# Altium PCB WeatherBalloon_Main.PcbDoc
Units mil, origin at the board's own origin, x right, y up, seen from the top; angles counter-clockwise.
Board outline 4725 x 2755 mil, 2 copper layers (Top Layer, Bottom Layer); 14 components, 16 nets, 106 pads, 9 vias.
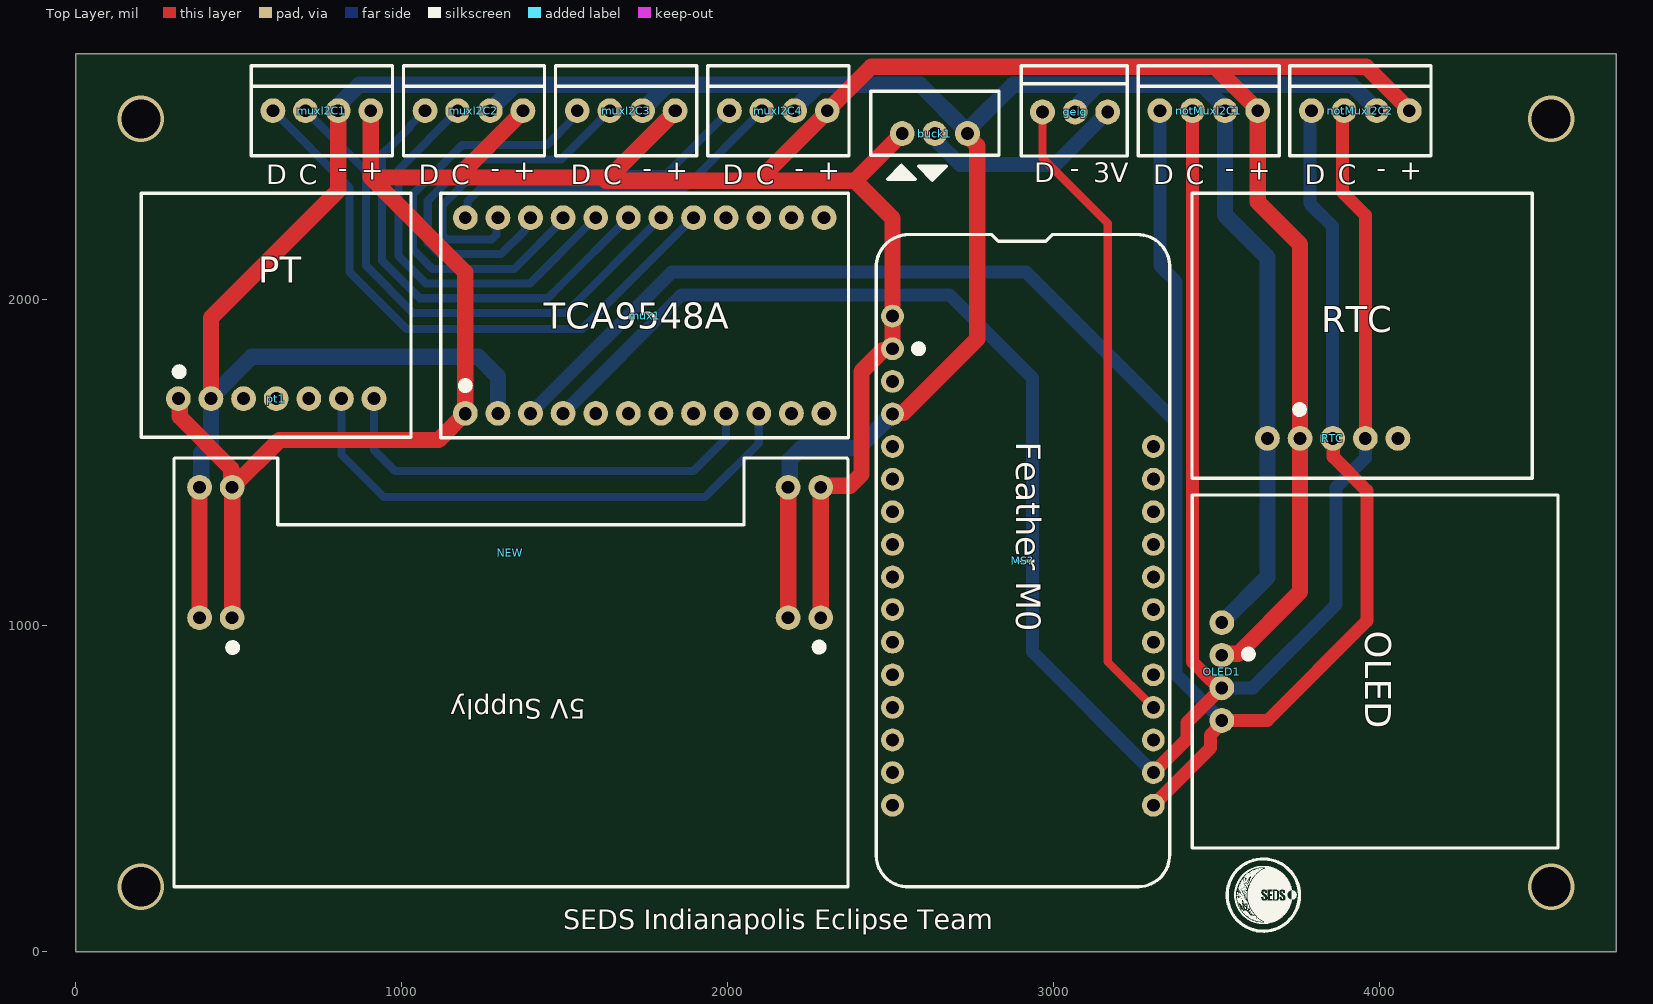
[diagram p0: Top Layer view]
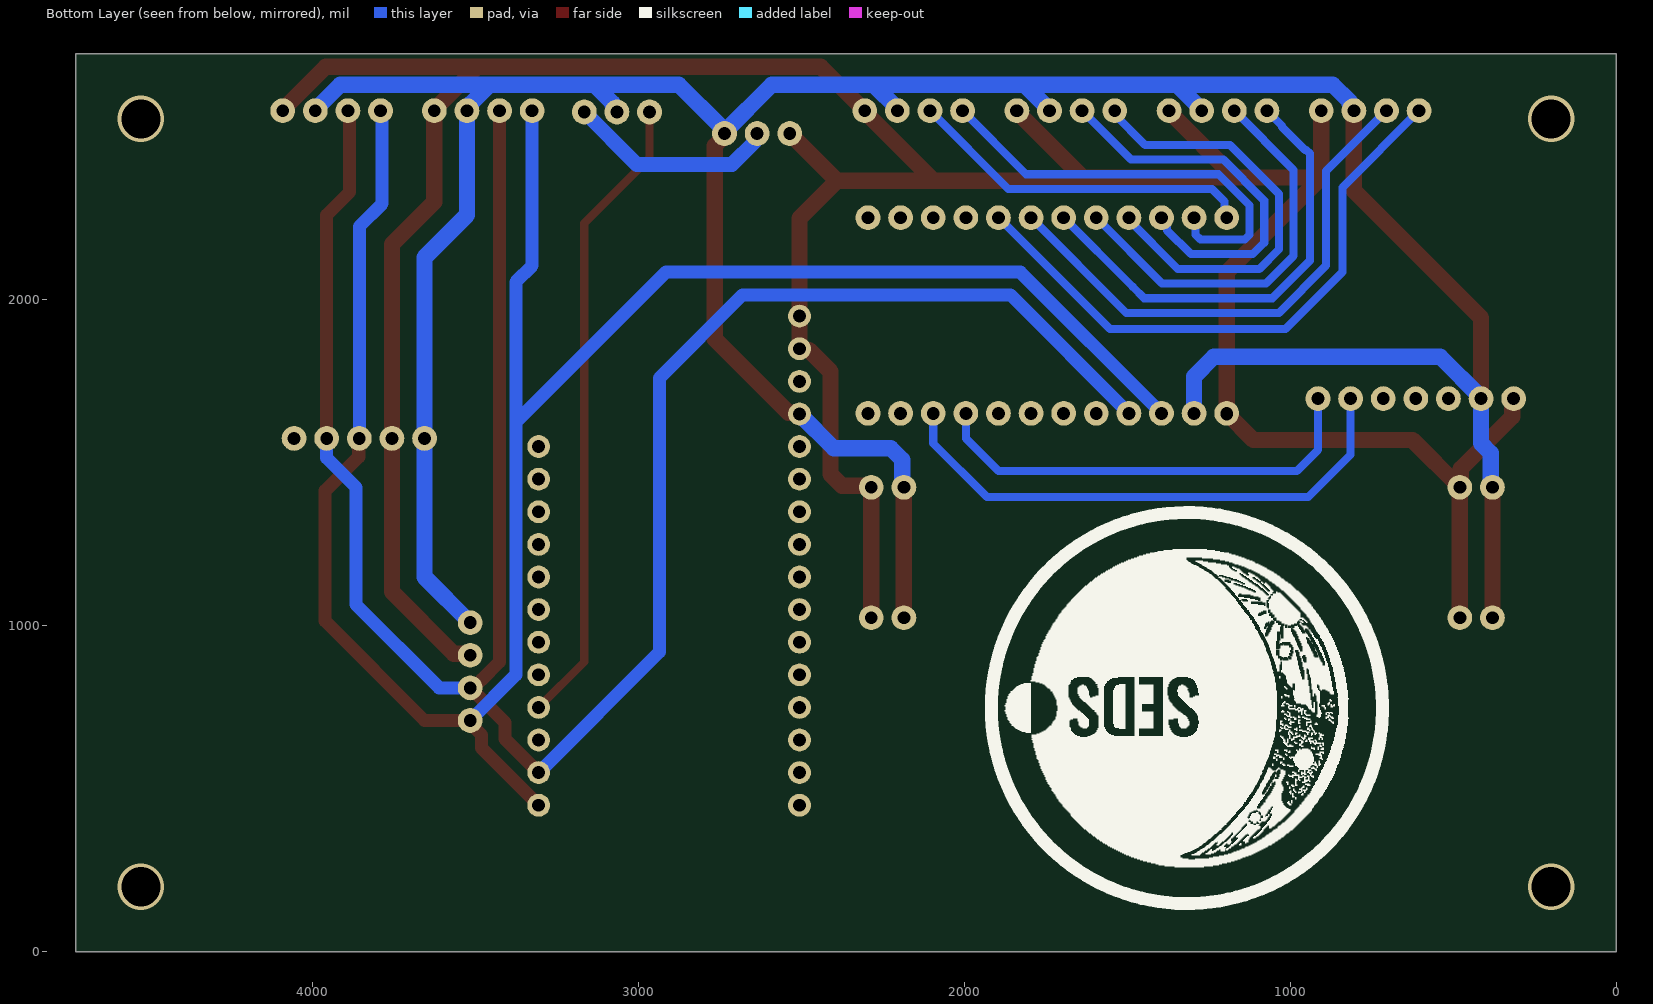
[diagram p1: Bottom Layer view, seen from below]

## Layer stack, top to bottom
Top Solder: solder mask 0.4, Solder Resist, Dk 3.5
Top Layer: signal copper 1.4
Dielectric 1: dielectric 12.6, FR-4, Dk 4.8
Bottom Layer: signal copper 1.4
Bottom Solder: solder mask 0.4, Solder Resist, Dk 3.5

## Board outline
0,0 4725,0 4725,2755 0,2755

## Design rules (kind name [scope] priority, off if disabled: settings)
Clearance Clearance_1 [OnMid vs OnMid] p1: gap=10 ignorepadtopadclearanceinfootprint=FALSE sourcerule=46 cellrowname=All cellrowtype=0 cellcolname=All cellcoltype=0 innerlayers=TRUE
Clearance Clearance_2 [(ExistsOnLayer('Top Layer') Or ExistsOnLayer('Bottom Layer')) vs (ExistsOnLayer('Top Layer') Or ExistsOnLayer('Bottom Layer'))] p2: gap=10 ignorepadtopadclearanceinfootprint=FALSE sourcerule=46 cellrowname=All cellrowtype=0 cellcolname=All cellcoltype=0 outerlayers=TRUE
Clearance [All] p3: gap=10 ignorepadtopadclearanceinfootprint=FALSE ismatrix=TRUE
DiffPairsRouting DifferentialPairsRouting_1 [InDifferentialPairClass('All Differential Pairs')] p1: maxlimit=20 minlimit=20 mostfreqgap=20 toplayer_minwidth=25 toplayer_maxwidth=25 toplayer_prefwidth=25 bottomlayer_minwidth=25 bottomlayer_maxwidth=25 bottomlayer_prefwidth=25 maxuncoupledlength=500
DiffPairsRouting [All] p2: maxlimit=10 minlimit=10 mostfreqgap=10 toplayer_minwidth=25 toplayer_maxwidth=60 toplayer_prefwidth=25 bottomlayer_minwidth=25 bottomlayer_maxwidth=60 bottomlayer_prefwidth=25 maxuncoupledlength=500
PolygonConnect [All] p1: connectstyle=Relief reliefconductorwidth=10 reliefentries=4 polygonreliefangle="90 Angle" airgapwidth=10
RoutingVias [All] p1: holewidth=28 width=50 viastyle="Through Hole" minholewidth=28 minwidth=50 maxholewidth=28 maxwidth=50
SolderMaskExpansion [All] p1: expansion=4 istentingtop=FALSE
Width MaxMinWidth_1 [InNet('5V')] p1: maxlimit=60 minlimit=50 preferedwidth=50 minimp=50.000000 maximp=50.000000 favimp=50.000000
Width MaxMinWidth_2 [InNet('sdaMaster')] p2: maxlimit=45 minlimit=10 preferedwidth=40 minimp=50.000000 maximp=50.000000 favimp=50.000000
Width MaxMinWidth_3 [InNet('GND')] p3: maxlimit=60 minlimit=50 preferedwidth=50 minimp=50.000000 maximp=50.000000 favimp=50.000000
Width MaxMinWidth_4 [InNet('sclMaster')] p4: maxlimit=45 minlimit=10 preferedwidth=40 minimp=50.000000 maximp=50.000000 favimp=50.000000
Width MaxMinWidth_5 [InNet('geigData')] p5: maxlimit=25 minlimit=10 preferedwidth=25 minimp=50.000000 maximp=50.000000 favimp=50.000000
Width MaxMinWidth_6 [InNet('Netbuck1_OUT')] p6: maxlimit=50 minlimit=10 preferedwidth=45 minimp=50.000000 maximp=50.000000 favimp=50.000000
Width MaxMinWidth_7 [InNet('scl0')] p7: maxlimit=60 minlimit=25 preferedwidth=25 minimp=50.000000 maximp=50.000000 favimp=50.000000
Width MaxMinWidth_8 [InNet('scl4')] p8: maxlimit=60 minlimit=10 preferedwidth=25 minimp=50.000000 maximp=50.000000 favimp=50.000000
Width MaxMinWidth_9 [InNet('scl5')] p9: maxlimit=60 minlimit=10 preferedwidth=25 minimp=50.000000 maximp=50.000000 favimp=50.000000
Width [All] p10: maxlimit=60 minlimit=25 preferedwidth=25 minimp=50.000000 maximp=50.000000 favimp=50.000000
29 further rules are at their usual default settings.

## Components (designator, comment, footprint, x,y, rotation, side; value= is the part's Value field where it differs from the comment)
buck1 "buckConverter" BUCKCONVERTER 2635,2510 r270 top
geig "TERMBLOCK_1X3" TERMINAL3 3065,2576.07 r270 top locked
MS? "FEATHERWING_NODIM" FEATHERWING_DIM 2455,2200 r270 top locked
mux1 "TCA9548APWR" MULTIPLEXER 1735,1951.89 r90 top locked
muxI2C1 "terminalBlock4" TERMINALBLOCK4 755,2580 r0 top locked
muxI2C2 "terminalBlock4" TERMINALBLOCK4 1221.67,2580 r0 top locked
muxI2C3 "terminalBlock4" TERMINALBLOCK4 1688.33,2580 r0 top locked
muxI2C4 "terminalBlock4" TERMINALBLOCK4 2155,2580 r0 top locked
NEW "powerSupply5V" POWERSUPPLY5V 1335,755 r180 top locked
notMuxI2C1 "terminalBlock4" TERMINALBLOCK4 3475,2580 r0 top locked
notMuxI2C2 "terminalBlock4" TERMINALBLOCK4 3940,2580 r0 top locked
OLED1 "OLED1" OLED 3990,855 r180 top locked
pt1 "pt1" PTSENSOR 615,1696.97 r270 top locked
RTC "RTC" RTC 3945,1890 r0 top

## Footprints (in the part's own frame and the unit in brackets; to place one, negate y for a bottom-side part, rotate by r counter-clockwise, add the part's x,y. Pads: shape width x height; smd on the part's side, far side on the other; paste and mask are expansions set on the pad)
BUCKCONVERTER [mil] "4.5 - 12V input, 3V output"
  round 76 / inner round 0 / far side round 76 hole 39.37: GND(0,100) OUT(0,0) Vin(0,-100)
  silkscreen extent -130,-197 143,197
FEATHERWING_DIM [mil] "FEATHERWING_DIM"
  round 70 / inner round 0 / far side round 70 hole 39.37: 1(250,50) 2(350,50) 3(450,50) 4(550,50) 5(650,50) 6(750,50) 7(850,50) 8(950,50) 9(1050,50) 10(1150,50) 11(1250,50) 12(1350,50) 13(1450,50) 14(1550,50) 15(1650,50) 16(1750,50) 17(1750,850) 18(1650,850) 19(1550,850) 20(1450,850) 21(1350,850) 22(1250,850) 23(1150,850) 24(1050,850) 25(950,850) 26(850,850) 27(750,850) 28(650,850)
  silkscreen extent 0,0 2000,900, body extent 25,15 1785,885, height 50
MULTIPLEXER [mil] "multiplexer pinout"
  round 76 / inner round 0 / far side round 76 hole 39.37: #RESET(-300,140) A0(-300,40) A1(-300,-60) A2(-300,-160) GND(-300,440) SCL(-300,240) SCL0(-300,-360) SCL1(-300,-560) SCL2(300,-460) SCL3(300,-260) SCL4(300,-60) SCL5(300,140) SCL6(300,340) SCL7(300,540) SDA(-300,340) SDA0(-300,-260) SDA1(-300,-460) SDA2(300,-560) SDA3(300,-360) SDA4(300,-160) SDA5(300,40) SDA6(300,240) SDA7(300,440) VCC(-300,540)
  silkscreen extent -375,-635 375,615
OLED [mil]
  round 76 / inner round 0 / far side round 76 hole 39.37: GND(475,-155) SCL(475,45) SDA(475,145) VCC(475,-55)
  silkscreen extent -556,-546 566,536
POWERSUPPLY5V [mil] "5V power supply"
  round 76 / inner round 0 / far side round 76 hole 39.37: 5V(-950,-270) 5V(-950,-670) 5V2(855,-270) 5V2(855,-670) GND(-850,-270) GND(-850,-670) GND2(955,-270) GND2(955,-670)
  silkscreen extent -1033,-760 1033,555
PTSENSOR [mil]
  round 76 / inner round 0 / far side round 76 hole 39.37: 3vo(0,-100) 5V(0,-300) GND(0,-200) int1(0,100) int2(0,0) SCL(0,200) SDA(0,300)
  silkscreen extent -630,-413 118,413
RTC [mil] "real time clock"
  round 76 / inner round 0 / far side round 76 hole 39.37: 5V(-190,-315) GND(-290,-315) SCL(10,-315) SDA(-90,-315) SQW(110,-315)
  silkscreen extent -522,-437 522,437
TERMINAL3 [mil] "Terminal block with 3 pins for geiger counter"
  round 76 / inner round 0 / far side round 76 hole 39.37: 3V(0,100) -(0,0) D(0,-100)
  silkscreen extent -142,-165 135,160
TERMINALBLOCK4 [mil]
  round 76 / inner round 0 / far side round 76 hole 39.37: 5V(150,0) GND(50,0) SC(-50,0) SD(-150,0)
  silkscreen extent -217,-138 217,138

## Part data
geig: library part terminal3, "3.5mm Terminal block    http://www.ladyada.net/library/pcb/eaglelibrary.html", DeviceSetName=TERMBLOCK_1X3, GateName_1=G$1, LibraryName=microbuilder, SymbolName_1=1X3
mux1: library part multiplexer, "TCA9548A I2C Multiplexer", VCC:Temp="VCC:  / Temp:", DeviceSetName=TCA9548A, GateName_1=G$1, LibraryName=microbuilder, SymbolName_1=TCA9548A
muxI2C1 muxI2C2 muxI2C3 muxI2C4 notMuxI2C1 notMuxI2C2: "Terminal Block with 4 pins, intended for I2C interfacing."
NEW: "5V power supply for solderless breadboard"
OLED1: library part OLED, "OLED screen"
pt1: library part PTsensor
MS?: DeviceName=_NODIM, DeviceSetName=FEATHERWING, GateName_1=G$1, LibraryName=microbuilder, SymbolName_1=MICROSHIELD

## Via types
v1: diameter 39.37, hole 39.37, Top Layer to Bottom Layer, 5 vias
v2: diameter 141.7/141.7 (per signal layer), hole 120, Top Layer to Bottom Layer, 4 vias

## Nets (pads, with @x,y where several pads share a name; then routed paths per layer and width w, separated by ;. In a path a pad name is that pad's centre, name@x,y a point inside that pad or via, vN(x,y) a via of type N, cw(c..) or ccw(c..) an arc to the next point about the centre after c; other vN are vias at no path point)
5V: buck1.Vin MS?.1 MS?.2 mux1.VCC muxI2C1.5V muxI2C2.5V muxI2C3.5V muxI2C4.5V NEW.5V NEW.5V2 notMuxI2C1.5V notMuxI2C2.5V OLED1.VCC pt1.5V RTC.5V | length 10672.8
  Top Layer w50: pt1.5V 318.92,1693.05 318.92,1641.08 477.6,1482.4 477.6,1427.4 NEW.5V2@480,1425 ; NEW.5V2@480,1025 NEW.5V2@480,1425 ; muxI2C1.5V@905,2576.76 905,2375 ; muxI2C2.5V@1370,2580 v1(1371,2580) muxI2C2.5V 1371.67,2576.67 1170,2375 ; 1636.57,2375 1170,2375 ; v1(1840,2580) muxI2C3.5V 1838.33,2576.76 1626.57,2365 2093.24,2365 ; NEW.5V@2285,1025 2285,1425 2289.97,1429.97 2374.97,1429.97 2410,1465 2410,1780 2476.17,1846.17 2501.17,1846.17 MS?.2 MS?.1 2505,2250 2390,2365 ; buck1.Vin 2390,2365 ; OLED1.VCC 3519.97,914.97 3564.97,914.97 3755,1105 RTC.5V 3755,2170 3625,2300 notMuxI2C1.5V 3625,2583.24 3493.24,2715 ; notMuxI2C2.5V 4090,2583.24 3958.24,2715 3493.24,2715 ; NEW.5V2@480,1425 625,1570 1113.11,1570 mux1.VCC 1195,2085 905,2375 ; 905,2375 1170,2375 ; 2093.24,2365 2390,2365 ; 2093.24,2365 2305,2576.76 v1(2305,2580) 2440,2715 3493.24,2715
  other v1: 1195,1650 905,2580
geigData: geig.D MS?.20 | length 1966.9
  Top Layer w25: geig.D 2965,2435 3165,2235 3165,890 MS?.20
GND: buck1.GND geig.- MS?.4 mux1.GND muxI2C1.GND muxI2C2.GND muxI2C3.GND muxI2C4.GND NEW.GND NEW.GND2 notMuxI2C1.GND notMuxI2C2.GND OLED1.GND pt1.GND RTC.GND | length 10266.7
  Top Layer w50: NEW.GND2@380,1025 NEW.GND2@380,1425 ; pt1.GND 415,1945 805,2335 muxI2C1.GND ; NEW.GND@2185,1025 NEW.GND@2185,1425 ; MS?.4 2508.83,1653.83 2538.83,1653.83 2765,1880 2765,2472.96 2735,2502.96 buck1.GND ; geig.- geig.-@3069.97,2581.04 ; notMuxI2C1.GND@3520.03,2584.97 notMuxI2C1.GND
  Bottom Layer w50: NEW.GND2@380,1425 384.97,1429.97 384.97,1529.97 415,1560 pt1.GND 415,1700.21 539.79,1825 1235,1825 1295,1765 mux1.GND ; muxI2C1.GND 805,2587.04 818,2600.04 818,2608 870,2660 1348.43,2660 ; muxI2C2.GND 1271.67,2583.24 1348.43,2660 ; muxI2C3.GND 1738.33,2583.33 1815,2660 ; NEW.GND@2185,1425 2189.97,1429.97 2189.97,1509.97 2225,1545 2400,1545 MS?.4 ; muxI2C4.GND 2205,2587.04 2275,2657.04 2275,2660 ; buck1.GND@2735,2514.83 2589.83,2660 2275,2660 ; buck1.GND@2735,2517.04 2748,2530.04 2748,2533 2875,2660 3135,2660 ; geig.- 3065,2583.1 3078,2596.1 3078,2603 3135,2660 ; notMuxI2C1.GND@3512,2603 3455,2660 ; OLED1.GND 3655,1150 RTC.GND 3655,2130 3525,2260 notMuxI2C1.GND ; notMuxI2C2.GND 3990,2583.24 3913.24,2660 3455,2660 ; 1348.43,2660 1815,2660 ; 1815,2660 2275,2660 ; 3135,2660 3455,2660
Netbuck1_OUT: buck1.OUT geig.3V | length 646.4
  Bottom Layer w45: buck1.OUT 2640.93,2504.07 2640.93,2486.39 2712.32,2415 3003.93,2415 geig.3V
scl0: mux1.SCL0 pt1.SCL | length 1666.1
  Bottom Layer w25: pt1.SCL 815,1525 945,1395 1930,1395 2095,1560 mux1.SCL0
scl4: mux1.SCL4 muxI2C1.SC | length 1637.6
  Bottom Layer w25: muxI2C1.SC 890,2395 890,2105 1035,1960 1503.11,1960 mux1.SCL4
scl5: mux1.SCL5 muxI2C2.SC | length 1244.1
  Bottom Layer w25: muxI2C2.SC 990,2398.33 990,2135 1075,2050 1393.11,2050 mux1.SCL5
scl6: mux1.SCL6 muxI2C3.SC | length 1190.9
  Bottom Layer w25: mux1.SCL6 1395,2238.09 1377.56,2220.65 1377.56,2212.56 1305,2140 1115,2140 1080,2175 1080,2305 1205,2430 1488.33,2430 muxI2C3.SC
scl7: mux1.SCL7 muxI2C4.SC | length 1071.2
  Bottom Layer w25: mux1.SCL7 1201.83,2258.72 1201.83,2301.83 1240,2340 1865,2340 muxI2C4.SC
sclMaster: MS?.18 mux1.SCL notMuxI2C1.SC notMuxI2C2.SC OLED1.SCL RTC.SCL | length 7258.7
  Top Layer w40: MS?.18 3407.96,652.96 3407.96,702.96 OLED1.SCL OLED1.SCL@3521.89,816.89 ; notMuxI2C1.SC 3425,889.52 3479.63,834.89 3480.37,834.89 OLED1.SCL@3505.26,810 ; notMuxI2C2.SC 3885,2575 3885,2330 3955,2260 RTC.SCL
  Bottom Layer w40: mux1.SCL 1858.11,2015 2680,2015 2935,1760 2935,920 MS?.18 ; OLED1.SCL 3610,810 3865,1065 3865,1425 3955,1515 RTC.SCL
sda0: mux1.SDA0 pt1.SDA | length 1382.2
  Bottom Layer w25: pt1.SDA 915,1540 980,1475 1895,1475 1995,1575 mux1.SDA0
sda4: mux1.SDA4 muxI2C1.SD | length 1861.4
  Bottom Layer w25: muxI2C1.SD 840,2345 840,2085 1015,1910 1553.11,1910 mux1.SDA4
sda5: mux1.SDA5 muxI2C2.SD | length 1421.6
  Bottom Layer w25: muxI2C2.SD 1025.5,2533.83 1025.5,2530.09 954.91,2459.5 951.17,2459.5 940,2448.33 940,2120 1055,2005 1448.11,2005 1483.11,2040 mux1.SDA5
sda6: mux1.SDA6 muxI2C3.SD | length 1339.7
  Bottom Layer w25: mux1.SDA6 1495,2245 1345,2095 1095,2095 1035,2155 1035,2325 1185,2475 1445,2475 1538.33,2568.33 muxI2C3.SD
sda7: mux1.SDA7 muxI2C4.SD | length 1322.2
  Bottom Layer w25: mux1.SDA7 1290.47,2247.36 1290.47,2199.64 1275.83,2185 1139.64,2185 1125,2199.64 1125,2290 1220,2385 1810,2385 muxI2C4.SD
sdaMaster: MS?.17 mux1.SDA notMuxI2C1.SD notMuxI2C2.SD OLED1.SDA RTC.SDA | length 6864.4
  Top Layer w40: MS?.17 3480,625 3480,665.26 3515,700.26 OLED1.SDA 3655,710 3960,1015 3960,1415 3856.8,1518.2 3856.8,1573.2 RTC.SDA
  Bottom Layer w40: mux1.SDA 1828.11,2085 2914.76,2085 3374.76,1625 ; MS?.17 MS?.17@3310.74,455.74 ; notMuxI2C1.SD 3325,2105 3374.76,2055.24 3374.76,1625 ; OLED1.SDA 3374.76,850.24 3374.76,1625 ; notMuxI2C2.SD 3785,2575 3785,2295 3855,2225 RTC.SDA
pads on no net: MS?.3 MS?.5 MS?.6 MS?.7 MS?.8 MS?.9 MS?.10 MS?.11 MS?.12 MS?.13 MS?.14 MS?.15 MS?.16 MS?.19 MS?.21 MS?.22 MS?.23 MS?.24 MS?.25 MS?.26 MS?.27 MS?.28 mux1.#RESET mux1.A0 mux1.A1 mux1.A2 mux1.SCL1 mux1.SCL2 mux1.SCL3 mux1.SDA1 mux1.SDA2 mux1.SDA3 pt1.3vo pt1.int1 pt1.int2 RTC.SQW
copper on no net:
  other v2: 200,200 4525,200 200,2555 4525,2555

## Silkscreen, mask and mechanical layers (free items; w line width, h text height)
Top Overlay:
  drawing of 113 lines, arcs and shapes, not listed
  text "SEDS Indianapolis Eclipse Team" at 1495,69.99 h60
Bottom Overlay:
  drawing of 113 lines, arcs and shapes, not listed
Board Shape:
  the board outline again, w19.68

## Text inside footprints (layer, text, board x,y; h text height)
geig: Top Overlay "-" at 3080,2421.06 h60 r180; Top Overlay "D" at 2940,2361.07 h60; Top Overlay "3V" at 3120,2361.07 h60
MS?: Top Overlay "Feather M0" at 2885,1565 h75 r270
mux1: Top Overlay "TCA9548A" at 1435,1911.89 h80
muxI2C1: Top Overlay "D" at 585,2355 h60; Top Overlay "C" at 685,2355 h60; Top Overlay "-" at 835,2419.99 h60 r180; Top Overlay "+" at 945,2420 h60 r180
muxI2C2: Top Overlay "D" at 1051.67,2355 h60; Top Overlay "C" at 1151.67,2355 h60; Top Overlay "-" at 1301.67,2419.99 h60 r180; Top Overlay "+" at 1411.67,2420 h60 r180
muxI2C3: Top Overlay "D" at 1518.33,2355 h60; Top Overlay "C" at 1618.33,2355 h60; Top Overlay "-" at 1768.33,2419.99 h60 r180; Top Overlay "+" at 1878.33,2420 h60 r180
muxI2C4: Top Overlay "D" at 1985,2355 h60; Top Overlay "C" at 2085,2355 h60; Top Overlay "-" at 2235,2419.99 h60 r180; Top Overlay "+" at 2345,2420 h60 r180
NEW: Top Overlay "5V Supply" at 1565,775.01 h60 r180
notMuxI2C1: Top Overlay "+" at 3665,2420 h60 r180; Top Overlay "-" at 3555,2419.99 h60 r180; Top Overlay "C" at 3405,2355 h60; Top Overlay "D" at 3305,2355 h60
notMuxI2C2: Top Overlay "+" at 4130,2420 h60 r180; Top Overlay "-" at 4020,2419.99 h60 r180; Top Overlay "C" at 3870,2355 h60; Top Overlay "D" at 3770,2355 h60
OLED1: Top Overlay "OLED" at 3955,985 h80 r270
pt1: Top Overlay "PT" at 560,2051.97 h80